# Altium PCB RTD 1k Wheatstone PGA-ADC Card.PcbDoc
Units mm, origin at the board's own origin, x right, y up, seen from the top; angles counter-clockwise.
Board outline 60 x 25 mm, 2 copper layers (Top Layer, Bottom Layer), stack 1.621 mm thick; 19 components, 21 nets, 126 pads, 45 vias.
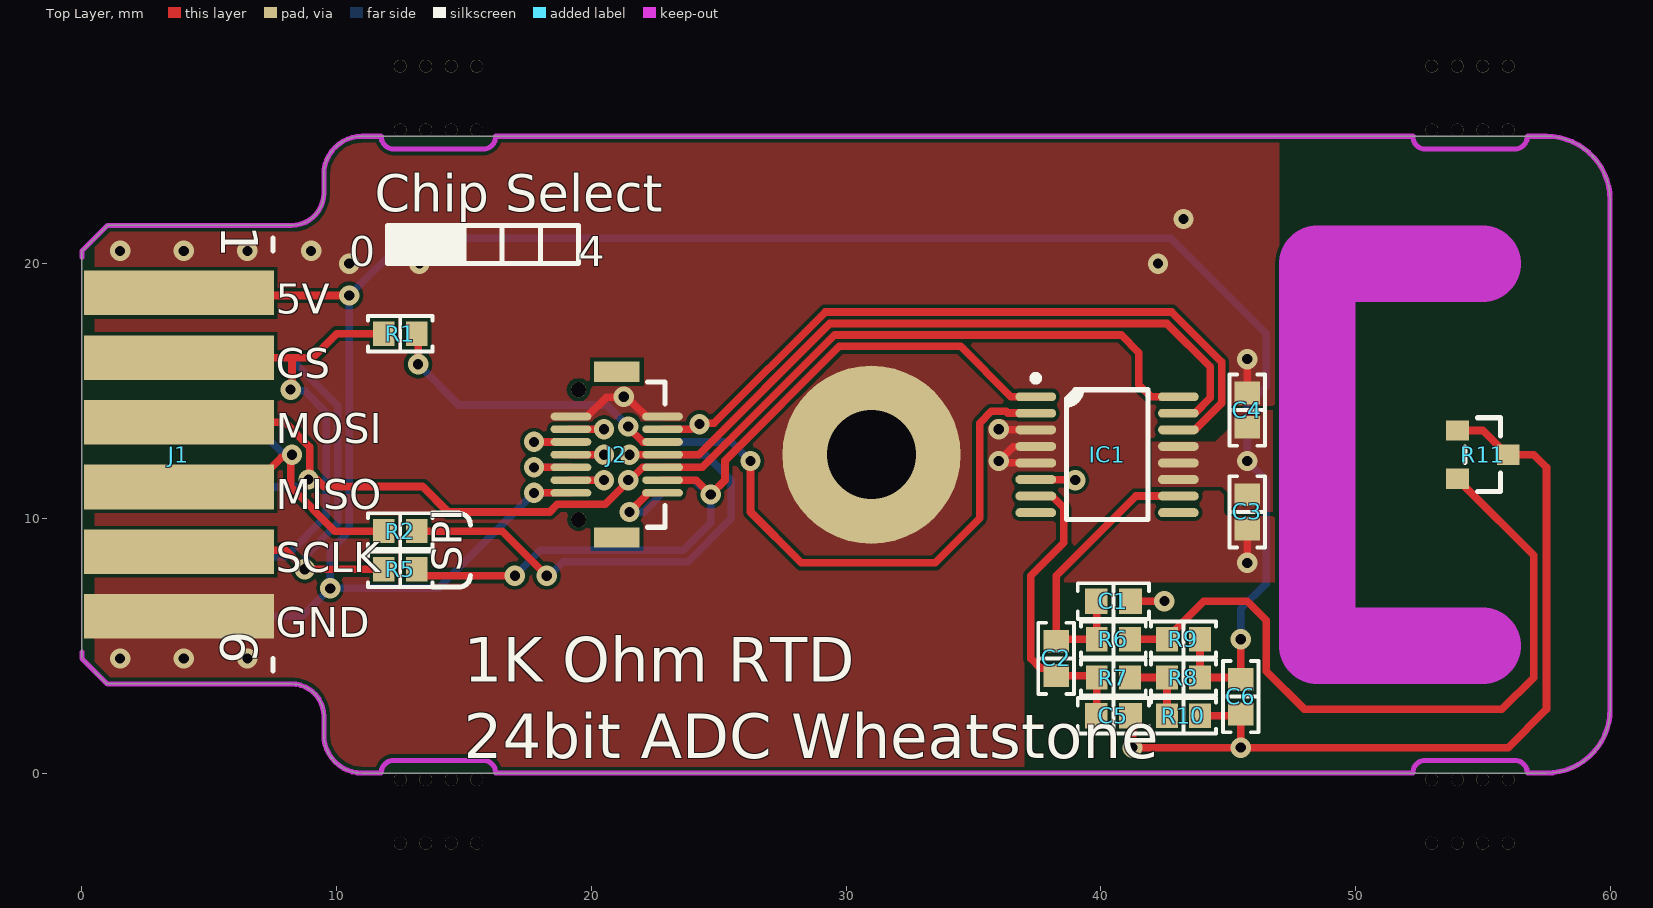
[diagram p0: Top Layer view]
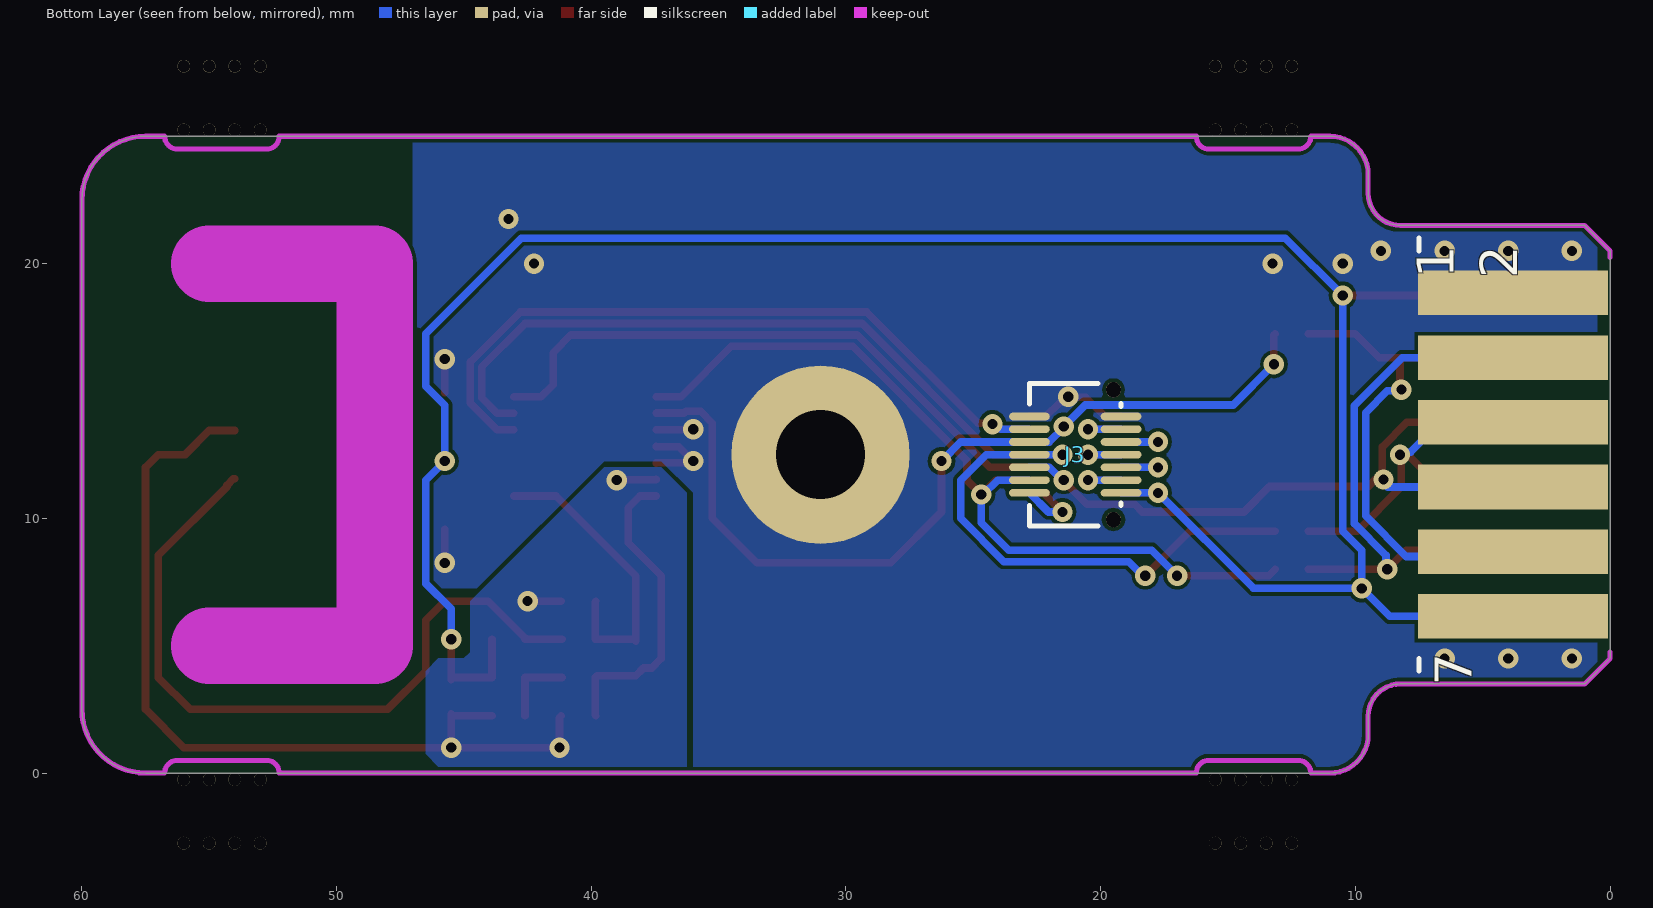
[diagram p1: Bottom Layer view, seen from below]
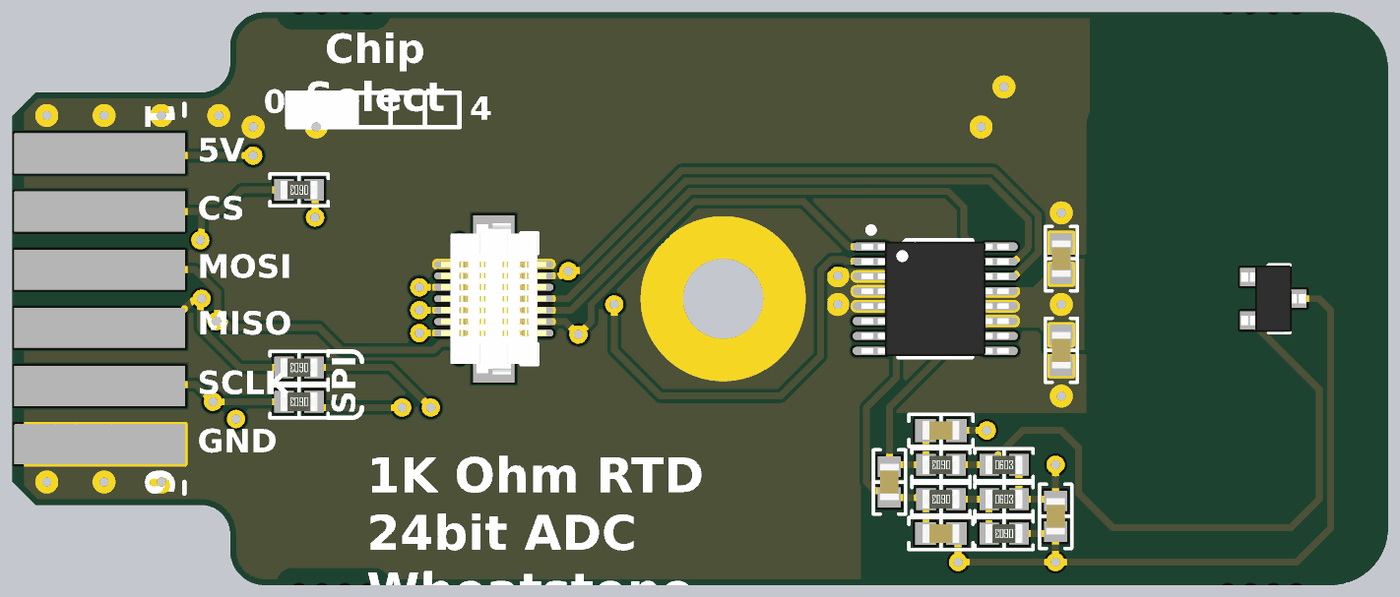
[diagram p2: 3D render of the assembled board from above, using the file's embedded part models]

## Layer stack, top to bottom
Top Solder: solder mask 0.0102, Solder Resist, Dk 3.5
Top Layer: signal copper 0.0356
Dielectric1: core 1.55, FR-4, Dk 4.8
Bottom Layer: signal copper 0.0356
Bottom Solder: solder mask 0.0102, Solder Resist, Dk 3.5

## Board outline
0,4.5 1,3.5 8.23,3.5 cw(c8.23,2.23) 9.5,2.23 9.5,1.5 ccw(c11,1.5) 11,0 57.5,0 ccw(c57.5,2.5) 60,2.5 60,22.5 ccw(c57.5,22.5) 57.5,25 11,25 ccw(c11,23.5) 9.5,23.5 9.5,22.77 cw(c8.23,22.77) 8.23,21.5 1,21.5 0,20.5

## Design rules (kind name [scope] priority, off if disabled: settings)
Clearance PadClearance [IsPad vs IsPad] p1: gap=0.15 ignorepadtopadclearanceinfootprint=FALSE
Clearance [All] p2: gap=0.15 ignorepadtopadclearanceinfootprint=FALSE
Height [All] p1: minheight=0 maxheight=2.9 prefheight=2.9
HoleSize [All] p1: absolutevalues=TRUE maxlimit=6 minlimit=0.4 maxpercent=80.000 minpercent=20.000
HoleToHoleClearance [All] p1: gap=0.2 allowstackedmicrovias=TRUE
MinimumSolderMaskSliver [All] p1: minsoldermaskwidth=0
PolygonConnect ViaConnect [IsVia] p1: connectstyle=Direct reliefconductorwidth=0.254 reliefentries=4 polygonreliefangle="90 Angle" airgapwidth=0.254
PolygonConnect [All] p2: connectstyle=Direct reliefconductorwidth=0.3 reliefentries=4 polygonreliefangle="90 Angle" airgapwidth=0.254
RoutingVias [All] p1: holewidth=0.6 width=1 viastyle="Through Hole" minholewidth=0.4 minwidth=0.8 maxholewidth=5 maxwidth=6
SilkToSilkClearance [All] p1: silktosilkclearance=0
SilkToSolderMaskClearance SilkscreenOverComponentPads [IsPad] p1: minsilkscreentomaskgap=0.05 clearancetoexposedcopper=TRUE
SolderMaskExpansion "Via Tenting" [IsVia] p1: expansion=-2 istentingtop=FALSE
SolderMaskExpansion [All] p2: expansion=0.102 istentingtop=FALSE
Width [All] p1: maxlimit=2 minlimit=0.2 preferedwidth=0.4
24 further rules are at their usual default settings.

## Components (designator, comment, footprint, x,y, rotation, side; value= is the part's Value field where it differs from the comment)
C1 "10000pF" "CAP 0603_1608" 40.5,6.75 r0 top
C2 "0.1µF" "CAP 0603_1608" 38.25,4.5 r270 top
C3 "0.1µF" "CAP 0603_1608" 45.75,10.25 r270 top
C4 "0.1µF" "CAP 0603_1608" 45.75,14.25 r90 top
C5 "10000pF" "CAP 0603_1608" 40.5,2.25 r180 top
C6 "0.1µF" "CAP 0603_1608" 45.5,3 r270 top
IC1 "ADS1120IPWR" "TI TSSOP-16 PW" 40.25,12.5 r0 top
J1 "12 Pin Dual Row" "TE 5650118-3 Card Edge" 0,12.5 r270 top
J2 "DF12(3.0)-14DP-0.5V(86)" "HIROSE DF12 3.0-14DP-0.5V 86" 21,12.5 r90 top
J3 "DF12A(3.0)-14DS-0.5V(81)" "HIROSE DF12A 3.0-14DS-0.5V 81" 21,12.5 r270 bottom
R1 "0 Ohms" "RES 0603_1608" 12.5,17.25 r180 top
R2 "0 Ohms" "RES 0603_1608" 12.5,9.5 r180 top
R5 "0 Ohms" "RES 0603_1608" 12.5,8 r180 top
R6 "1 kOhms" "RES 0603_1608" 40.5,5.25 r180 top
R7 "1 kOhms" "RES 0603_1608" 40.5,3.75 r180 top
R8 "10 kOhms" "RES 0603_1608" 43.25,3.75 r0 top
R9 "10 kOhms" "RES 0603_1608" 43.25,5.25 r0 top
R10 "1 kOhms" "RES 0603_1608" 43.25,2.25 r180 top
R11 "ZNI1000TA" "DIODES SOT-23-3" 55,12.5 r0 top

## Footprints (in the part's own frame and the unit in brackets; to place one, negate y for a bottom-side part, rotate by r counter-clockwise, add the part's x,y. Pads: shape width x height; smd on the part's side, far side on the other; paste and mask are expansions set on the pad)
"CAP 0603_1608" [mm] "Chip Capacitor, 2-Leads, Body 1.60x0.80mm, IPC Medium Density"
  rect 0.9x1 smd: 1(-0.675,0) 2(0.675,0)
  silkscreen extent -1.4,-0.7 1.4,0.7, body extent -0.8,-0.41 0.8,0.41, height 0.82
"DIODES SOT-23-3" [mm] "SOT23, 3-Leads, Body 2.90x2.40mm, Pitch 0.95mm, IPC Medium Density"
  rect 0.9x0.8 smd: 1(-1,0.95) 2(-1,-0.95) 3(1,0)
  silkscreen extent -0.7,-1.45 0.7,1.45, body extent -1.41,-1.45 1.41,1.45, height 1.5
"HIROSE DF12 3.0-14DP-0.5V 86" [mm] "14 Position Connector Header, 0.50mm Pitch,5.7x3.8mm Body"
  oval 0.3x1.6 smd: 1(-1.5,-1.8) 2(-1,-1.8) 3(-0.5,-1.8) 4(0,-1.8) 5(0.5,-1.8) 6(1,-1.8) 7(1.5,-1.8) 8(1.5,1.8) 9(1,1.8) 10(0.5,1.8) 11(0,1.8) 12(-0.5,1.8) 13(-1,1.8) 14(-1.5,1.8)
  round 0.6 hole 0.6 unplated: B(-2.55,1.5) B(2.55,1.5)
  rect 0.8x1.8 smd: M(-3.25,0) M(3.25,0)
  silkscreen extent -2.85,-1.9 2.85,-1.2, body extent -3.3,-2.3 3.3,2.3, height 2.3
"HIROSE DF12A 3.0-14DS-0.5V 81" [mm] "14 Position Connector Receptacle, 0.50mm Pitch,5.60x3.60mm Body"
  oval 0.3x1.6 smd: 1(1.5,-1.8) 2(1,-1.8) 3(0.5,-1.8) 4(0,-1.8) 5(-0.5,-1.8) 6(-1,-1.8) 7(-1.5,-1.8) 8(-1.5,1.8) 9(-1,1.8) 10(-0.5,1.8) 11(0,1.8) 12(0.5,1.8) 13(1,1.8) 14(1.5,1.8)
  round 0.6 hole 0.6 unplated: B(-2.55,1.5) B(2.55,1.5)
  silkscreen extent -2.8,-1.8 2.8,1.8, body extent -2.8,-2.3 2.8,2.3, height 2.2
"RES 0603_1608" [mm] "Chip Resistor, 2-Leads, Body 1.60x0.80mm, IPC Medium Density"
  rect 0.85x0.95 smd: 1(-0.65,0) 2(0.65,0)
  silkscreen extent -1.27,-0.7 1.27,0.7, body extent -0.8,-0.4 0.8,0.4, height 0.45
"TE 5650118-3 Card Edge" [mm] "Card Edge contacts for TE Connector"
  rect 1.75x7.46 smd: 1(-6.35,3.81) 2(-3.81,3.81) 3(-1.27,3.81) 4(1.27,3.81) 5(3.81,3.81) 6(6.35,3.81)
  rect 1.75x7.46 smd far side: 7(6.35,3.81) 8(3.81,3.81) 9(1.27,3.81) 10(-1.27,3.81) 11(-3.81,3.81) 12(-6.35,3.81)
  silkscreen extent -8.5,7.5 8.5,7.5
"TI TSSOP-16 PW" [mm] "TSSOP, 16-Leads, Body 5.00x4.40mm, Pitch 0.65mm, IPC Medium Density"
  oval 1.6x0.35 smd: 1(-2.8,2.275) 2(-2.8,1.625) 3(-2.8,0.975) 4(-2.8,0.325) 5(-2.8,-0.325) 6(-2.8,-0.975) 7(-2.8,-1.625) 8(-2.8,-2.275) 9(2.8,-2.275) 10(2.8,-1.625) 11(2.8,-0.975) 12(2.8,-0.325) 13(2.8,0.325) 14(2.8,0.975) 15(2.8,1.625) 16(2.8,2.275)
  silkscreen extent -2.92,-2.55 1.6,3.12, body extent -3.21,-2.5 3.21,2.5, height 1.2

## Part data
C1 C5: library part AC0603KPX7R9BB103, "CAP CER 10000PF 50V X7R 0603", Device Package="0603 (1608 Metric)", Manufacturer=Yageo, Operating Temperature="-55°C ~ 125°C", Ratings=AEC-Q200, Supplier Part Number 1=311-3284-1-ND, Temperature Coefficient=X7R, Tolerance=±10%, Voltage - Rated=50V, Applications=Automotive, Capacitance=10000pF, ComponentLink1Description=Datasheet, ComponentLink1URL=http://www.yageo.com/NewPortal/_en/search/productDocs.jsp?YageoPartNumber=AC0603KPX7R9BB103, ComponentLink2Description="DigiKey Link", ComponentLink2URL=http://digikey.com/product-detail/en/yageo/AC0603KPX7R9BB103/311-3284-1-ND/6643536, LastUpdated="02/09/2020 01:03:31", Lifecycle Status=Active, Minimum Order=1, Mounting Type="Surface Mount, MLCC", Package / Case="0603 (1608 Metric)", Packaging=TapeAndReel, Part Number=AC0603KPX7R9BB103, Part Status=Active, PartId=5188, Price=0.01, Series=AC, Size / Dimension="0.063\" L x 0.031\" W (1.60mm x 0.80mm)", Supplier 1=DigiKey, Thickness (Max)="0.035\" (0.90mm)"
C2 C3 C4 C6: library part CC0603ZRY5V7BB104, "CAP CER 0.1UF 16V Y5V 0603", Device Package="0603 (1608 Metric)", Manufacturer=Yageo, Operating Temperature="-30°C ~ 85°C", Supplier Part Number 1=311-1369-1-ND, Temperature Coefficient="Y5V (F)", Tolerance="-20%, +80%", Voltage - Rated=16V, Applications="General Purpose", Capacitance=0.1µF, ComponentLink1Description=Datasheet, ComponentLink1URL=http://www.yageo.com/documents/recent/UPY-GPHC_Y5V_6.3V-to-50V_8.pdf, ComponentLink2Description="DigiKey Link", ComponentLink2URL=http://digikey.com/product-detail/en/yageo/CC0603ZRY5V7BB104/311-1369-1-ND/2103153, LastUpdated="21/01/2020 00:01:38", Lifecycle Status=Active, Minimum Order=1, Mounting Type="Surface Mount, MLCC", Package / Case="0603 (1608 Metric)", Packaging=TapeAndReel, Part Number=CC0603ZRY5V7BB104, Part Status=Active, PartId=17881, Price=0.01, Series=CC, Size / Dimension="0.063\" L x 0.031\" W (1.60mm x 0.80mm)", Supplier 1=DigiKey, Thickness (Max)="0.035\" (0.90mm)"
IC1: "IC ADC 16BIT SIGMA-DELTA 16TSSOP", Device Package="16-TSSOP (0.173\", 4.40mm Width)", Manufacturer="Texas Instruments", Operating Temperature="-40°C ~ 125°C", Supplier Device Package=16-TSSOP, Supplier Part Number 1=296-37280-2-ND, Voltage - Supply, Analog="2.3V ~ 5.5V", Architecture=Sigma-Delta, ComponentLink1Description=Datasheet, ComponentLink1URL=http://www.ti.com/general/docs/suppproductinfo.tsp?distId=10&gotoUrl=http%3A%2F%2Fwww.ti.com%2Flit%2Fgpn%2Fads1120, ComponentLink2Description="DigiKey Link", ComponentLink2URL=//digikey.com/product-detail/en/texas-instruments/ADS1120IPWR/296-37280-2-ND/4701590, Configuration=MUX-PGA-ADC, Data Interface=SPI, Features="PGA, Temperature Sensor", Input Type="Differential, Single Ended", LastUpdated="02/12/2019 15:46:46", Lifecycle Status=0, Minimum Order=1, Mounting Type="Surface Mount", Number of A/D Converters=1, Number of Bits=16, Number of Inputs="2, 4", Package / Case="16-TSSOP (0.173\", 4.40mm Width)", Packaging=TapeAndReel, Part Number=ADS1120IPWR, Part Status=Active, PartId=4, Price=3.47, Reference Type="External, Internal, Supply", Sampling Rate (Per Second)=2k, Series=-, Supplier 1=DigiKey, Voltage - Supply, Digital="2.3V ~ 5.5V"
J2: "CONN HDR 14POS SMD GOLD", Manufacturer="Hirose Electric Co Ltd", Supplier Part Number 1=H11701CT-ND, ComponentLink1Description=Datasheet, ComponentLink1URL=https://www.hirose.com/product/download/?distributor=digikey&type=specSheet&lang=en&num=DF12(3.0)-14DP-0.5V(86), ComponentLink2Description="DigiKey Link", ComponentLink2URL=http://digikey.com/product-detail/en/hirose-electric-co-ltd/DF12-3.0-14DP-0.5V-86/H11701CT-ND/2172493, Connector Type="Header, Outer Shroud Contacts", Contact Finish=Gold, Contact Finish Thickness="8.00µin (0.203µm)", Features="Board Guide, Solder Retention", Height Above Board="0.091\" (2.30mm)", LastUpdated="06/08/2020 22:47:47", Lifecycle Status=Active, Mated Stacking Heights=3mm, Minimum Order=1, Mounting Type="Surface Mount", Number of Positions=14, Number of Rows=2, Packaging=TapeAndReel, Part Number=DF12(3.0)-14DP-0.5V(86), Part Status=Active, Pitch="0.020\" (0.50mm)", Price=0.38, Series=DF12, Supplier 1=DigiKey
J3: "CONN RCPT 14POS SMD GOLD", Manufacturer="Hirose Electric Co Ltd", Supplier Part Number 1=H11713CT-ND, ComponentLink1Description=Datasheet, ComponentLink1URL=https://www.hirose.com/product/document?clcode=CL0537-0721-0-86&productname=DF12(3.0)-10DP-0.5V(86)&series=DF12&documenttype=Catalog&lang=en&documentid=D31693_en, ComponentLink2Description="DigiKey Link", ComponentLink2URL=http://digikey.com/product-detail/en/hirose-electric-co-ltd/DF12A-3.0-14DS-0.5V-81/H11713CT-ND/2172505, Connector Type="Receptacle, Center Strip Contacts", Contact Finish=Gold, Contact Finish Thickness="8.00µin (0.203µm)", Features="Board Guide", Height Above Board="0.087\" (2.20mm)", LastUpdated="06/08/2020 22:48:47", Lifecycle Status=Active, Mated Stacking Heights=3mm, Minimum Order=1, Mounting Type="Surface Mount", Number of Positions=14, Number of Rows=2, Packaging=TapeAndReel, Part Number=DF12A(3.0)-14DS-0.5V(81), Part Status=Active, Pitch="0.020\" (0.50mm)", Price=0.36, Series=DF12, Supplier 1=DigiKey
R1 R2 R5: library part ERJ-3GEY0R00V, "RES SMD 0 OHM JUMPER 1/10W 0603", Device Package="0603 (1608 Metric)", Manufacturer="Panasonic Electronic Components", Operating Temperature="-55°C ~ 155°C", Power (Watts)="0.1W, 1/10W", Ratings=AEC-Q200, Supplier Device Package=0603, Supplier Part Number 1=P0.0GCT-ND, Tolerance=Jumper, ComponentLink1Description=Datasheet, ComponentLink1URL=http://industrial.panasonic.com/www-cgi/jvcr13pz.cgi?E+PZ+3+AOA0001+ERJ3GEY0R00V+7+WW, ComponentLink2Description="DigiKey Link", ComponentLink2URL=http://digikey.com/product-detail/en/panasonic-electronic-components/ERJ-3GEY0R00V/P0.0GCT-ND/134711, Composition="Thick Film", Features="Automotive AEC-Q200", Height - Seated (Max)="0.022\" (0.55mm)", LastUpdated="13/08/2020 10:36:40", Lifecycle Status=Active, Minimum Order=1, Number of Terminations=2, Package / Case="0603 (1608 Metric)", Packaging=CutTape, Part Number=ERJ-3GEY0R00V, Part Status=Active, PartId=22603, Price=0.10, Resistance="0 Ohms", Series=ERJ, Size / Dimension="0.063\" L x 0.031\" W (1.60mm x 0.80mm)", Supplier 1=DigiKey
R6 R7 R10: library part ERJ-PB3B1001V, "RES SMD 1K OHM 0.1% 1/5W 0603", Device Package="0603 (1608 Metric)", Manufacturer="Panasonic Electronic Components", Operating Temperature="-55°C ~ 155°C", Power (Watts)="0.2W, 1/5W", Ratings=AEC-Q200, Supplier Device Package=0603, Supplier Part Number 1=P19972CT-ND, Temperature Coefficient=±50ppm/°C, Tolerance=±0.1%, ComponentLink1Description=Datasheet, ComponentLink1URL=https://industrial.panasonic.com/cdbs/www-data/pdf/RDM0000/AOA0000C328.pdf, ComponentLink2Description="DigiKey Link", ComponentLink2URL=http://digikey.com/product-detail/en/panasonic-electronic-components/ERJ-PB3B1001V/P19972CT-ND/6214227, Composition="Thick Film", Features="Automotive AEC-Q200, Pulse Withstanding", Height - Seated (Max)="0.022\" (0.55mm)", LastUpdated="21/01/2020 00:19:14", Lifecycle Status=Active, Minimum Order=1, Number of Terminations=2, Package / Case="0603 (1608 Metric)", Packaging=TapeAndReel, Part Number=ERJ-PB3B1001V, Part Status=Active, PartId=18865, Price=0.03, Resistance="1 kOhms", Series=ERJ, Size / Dimension="0.063\" L x 0.031\" W (1.60mm x 0.80mm)", Supplier 1=DigiKey
R8 R9: library part ERA-3AEB103V, "RES SMD 10K OHM 0.1% 1/10W 0603", Device Package="0603 (1608 Metric)", Manufacturer="Panasonic Electronic Components", Operating Temperature="-55°C ~ 155°C", Power (Watts)="0.1W, 1/10W", Ratings=AEC-Q200, Supplier Device Package=0603, Supplier Part Number 1=P10KDBCT-ND, Temperature Coefficient=±25ppm/°C, Tolerance=±0.1%, ComponentLink1Description=Datasheet, ComponentLink1URL=https://industrial.panasonic.com/cdbs/www-data/pdf/RDM0000/AOA0000C307.pdf, ComponentLink2Description="DigiKey Link", ComponentLink2URL=http://digikey.com/product-detail/en/panasonic-electronic-components/ERA-3AEB103V/P10KDBCT-ND/1466076, Composition="Thin Film", Features="Automotive AEC-Q200", Height - Seated (Max)="0.022\" (0.55mm)", LastUpdated="21/01/2020 00:24:44", Lifecycle Status=Active, Minimum Order=1, Number of Terminations=2, Package / Case="0603 (1608 Metric)", Packaging=TapeAndReel, Part Number=ERA-3AEB103V, Part Status=Active, PartId=5506, Price=0.04, Resistance="10 kOhms", Series=ERA-3A, Size / Dimension="0.063\" L x 0.031\" W (1.60mm x 0.80mm)", Supplier 1=DigiKey
R11: "SENSOR RTD 1KOHM 5% TO236-3", Current=3mA, Device Package="TO-236-3, SC-59, SOT-23-3", Manufacturer="Diodes Incorporated", Operating Temperature="-55°C ~ 150°C", Resistance @ 0°C="1 kOhms", Supplier Part Number 1=ZNI1000CT-ND, Accuracy=±0.4°C, ComponentLink1Description=Datasheet, ComponentLink1URL=https://www.diodes.com/assets/Datasheets/ZNI1000.pdf, ComponentLink2Description="DigiKey Link", ComponentLink2URL=http://digikey.com/product-detail/en/diodes-incorporated/ZNI1000TA/ZNI1000CT-ND/1211584, LastUpdated="25/05/2020 21:35:29", Lifecycle Status=Active, Minimum Order=1, Mounting Type="Surface Mount", Package / Case="TO-236-3, SC-59, SOT-23-3", Packaging=TapeAndReel, Part Number=ZNI1000TA, Part Status=Active, Price=1.16, RTD Material=Nickel, Supplier 1=DigiKey, Termination="SMD (SMT) Tabs"

## Free pads (board coordinates)
  round 7 hole 3.5: M(31,12.5)
  round 0.5 hole 0.5 unplated: N(12.5,-2.75) N(12.5,-0.25) N(12.5,25.25) N(12.5,27.75) N(13.5,-2.75) N(13.5,-0.25) N(13.5,25.25) N(13.5,27.75) N(14.5,-2.75) N(14.5,-0.25) N(14.5,25.25) N(14.5,27.75) N(15.5,-2.75) N(15.5,-0.25) N(15.5,25.25) N(15.5,27.75) N(53,-2.75) N(53,-0.25) N(53,25.25) N(53,27.75) N(54,-2.75) N(54,-0.25) N(54,25.25) N(54,27.75) N(55,-2.75) N(55,-0.25) N(55,25.25) N(55,27.75) N(56,-2.75) N(56,-0.25) N(56,25.25) N(56,27.75)

## Via types
v1: diameter 0.8, hole 0.4, Top Layer to Bottom Layer, 45 vias

## Nets (pads, with @x,y where several pads share a name; then routed paths per layer and width w, separated by ;. In a path a pad name is that pad's centre, name@x,y a point inside that pad or via, vN(x,y) a via of type N, cw(c..) or ccw(c..) an arc to the next point about the centre after c; other vN are vias at no path point)
3V3: J2.1 J3.1 | length 3.3
  Top Layer w0.3: v1(21.5,10.25) 22.15,10.9 22.15,11 J2.1
  Bottom Layer w0.3: v1(21.5,10.25) 22.05,10.25 J3.1
5V: C3.1 C4.1 C6.1 IC1.11 IC1.12 IC1.13 J1.1 J1.7 J2.14 J3.14 R8.2 R9.2 | length 93.4
  Top Layer w0.3: J1.1 3.91,18.75 v1(10.5,18.75) ; v1(17.75,11) J2.14 ; R9.2 R8.2 45.425,3.75 C6.1 v1(45.5,5.25)
  Bottom Layer w0.3: J1.7 8.65,6.15 v1(9.75,7.25) ; v1(17.75,11) 14,7.25 v1(9.75,7.25) ; v1@18,11 J3.14 ; v1(45.5,5.25) 45.5,6.443 46.5,7.443 46.5,11.5 v1(45.75,12.25) 45.75,14.443 46.5,15.193 46.5,17.25 42.75,21 12.75,21 v1(10.5,18.75) 10.5,9.5 9.75,8.75 v1(9.75,7.25)
CS: J1.2 J1.8 R1.2 | length 22.1
  Top Layer w0.3: J1.2 8.25,16.31 ; v1(8.194,15.056) 8.25,15.111 8.25,16.31 ; R1.2 10,17.25 9.06,16.31 8.25,16.31
  Bottom Layer w0.3: J1.8 4,8.5 8,8.5 9.6,10.1 9.6,14.15 8.745,15.005 8.245,15.005 v1(8.194,15.056)
CS0: IC1.2 J2.5 J3.5 R1.1 | length 36.2
  Top Layer w0.3: R1.1 13.2,17.2 v1(13.2,16.05) ; v1(21.45,13.607) 21.45,13.564 22.014,13 J2.5 ; v1(26.25,12.25) 26.25,10.25 28.25,8.25 33.5,8.25 35.25,10 35.25,13.74 35.71,14.2 36.29,14.2 36.355,14.135 37.44,14.135 IC1.2
  Bottom Layer w0.3: v1(13.2,16.05) 14.8,14.45 20.607,14.45 v1(21.45,13.607) 21.45,13.564 22.014,13 25.5,13 v1(26.25,12.25)
CS1: IC1.14 J2.6 J3.6 | length 29.5
  Top Layer w0.3: J2.6 23.915,13.5 24.115,13.7 v1(24.25,13.7) 24.286,13.736 24.816,13.736 29.181,18.1 42.786,18.1 44.75,16.136 44.75,14.528 43.722,13.5 43.714,13.5 43.689,13.475 IC1.14
  Bottom Layer w0.3: J3.6 v1@23.915,13.5
CS2: J2.13 J3.13 | length 2.6
  Top Layer w0.3: J2.13 v1(20.5,11.5)
  Bottom Layer w0.3: J3.13 v1(20.5,11.5)
CS3: J2.12 J3.12 | length 2.9
  Top Layer w0.3: v1(17.75,12) J2.12
  Bottom Layer w0.3: v1(17.75,12) J3.12
CS4: J2.11 J3.11 | length 2.6
  Top Layer w0.3: J2.11 v1(20.5,12.5)
  Bottom Layer w0.3: J3.11 v1(20.5,12.5)
DCLK: J1.5 J1.11 R5.2 | length 22.4
  Top Layer w0.3: J1.5 3.87,8.75 8,8.75 v1(8.75,8) 10.75,8 R5.2
  Bottom Layer w0.3: J1.11 8.167,16.31 10.05,14.427 10.05,9.8 8.801,8.551 8.801,8.051 v1(8.75,8)
DD: J1.4 J1.10 R2.2 | length 15.1
  Top Layer w0.3: J1.4 6.665,11.23 7.839,12.404 ; v1(8.25,12.5) 8.2,12.45 8.2,11.235 9.935,9.5 R2.2
  Bottom Layer w0.3: J1.10 6.665,13.77 7.839,12.596 8.154,12.596 v1(8.25,12.5)
GND: C3.2 C4.2 IC1.3 IC1.4 IC1.5 J1.6 J1.12 J2.7 J2.8 J3.7 J3.8 pad.M | length 11.7
  Top Layer w0.3: J1.6 J1.6@3.91,6.25 ; J2.8 19.85,14 20.6,14.75 21.25,14.75 21.4,14.75 21.65,14.5 22.15,14 J2.7 ; v1@21.273,14.75 v1(21.273,14.773) ; v1(36,13.5) 36.015,13.485 37.44,13.485 IC1.3 ; IC1.5 37.44,12.185 36.065,12.185 v1(36,12.25) 36.565,12.815 37.44,12.815 IC1.4 ; v1(45.75,8.25) C3.2 ; C4.2 v1(45.75,16.25)
  other v1: 1.5,4.5 4,4.5 6.5,4.5 10.5,20 13.25,20 42.25,20 1.5,20.5 4,20.5 6.5,20.5 9,20.5 9,20.5 43.25,21.75
I2C_SCL: J2.10 J3.10 | length 2.9
  Top Layer w0.3: v1(17.75,13) J2.10
  Bottom Layer w0.3: v1(17.75,13) J3.10
I2C_SDA: J2.9 J3.9 | length 2.6
  Top Layer w0.3: J2.9 v1(20.5,13.5)
  Bottom Layer w0.3: J3.9 v1(20.5,13.5)
MISO: IC1.15 J2.4 J3.4 R2.1 | length 48.3
  Top Layer w0.3: R2.1 16.5,9.5 v1(18.25,7.75) ; v1(21.5,12.5) 24.217,12.5 29.367,17.65 42.6,17.65 44.3,15.95 44.3,14.728 43.722,14.15 43.714,14.15 43.689,14.125 IC1.15
  Bottom Layer w0.3: v1(18.25,7.75) 18.352,7.75 18.902,8.3 23.8,8.3 25.5,10 25.5,11.5 24.5,12.5 J3.4 v1(21.5,12.5)
MOSI: IC1.16 J1.3 J1.9 J2.3 J3.3 | length 52.9
  Top Layer w0.3: J1.3 7.98,13.77 8.95,12.8 8.95,11.8 9.1,11.65 9.1,11.525 v1(8.9,11.525) ; v1@9.225,11.525 9.5,11.25 13.375,11.25 14.375,10.25 18.37,10.25 18.67,10.55 20.54,10.55 21.45,11.46 v1(21.45,11.5) 21.514,11.5 22.014,12 J2.3 24.354,12 29.554,17.2 40.8,17.2 41.5,16.5 41.5,15.25 41.975,14.775 IC1.16
  Bottom Layer w0.3: J1.9 8.724,11.23 8.9,11.406 v1(8.9,11.525) ; v1(21.45,11.5) 21.514,11.5 22.014,12 J3.3
NetC1_1: C1.1 C2.1 IC1.10 R6.2 | length 11.8
  Top Layer w0.3: C1.1 39.85,6.725 R6.2 38.325,5.25 C2.1 38.25,7.75 41.375,10.875 IC1.10
NetC2_2: C2.2 C5.2 IC1.7 R7.2 | length 12.2
  Top Layer w0.3: IC1.7 38.089,10.875 38.114,10.85 38.122,10.85 38.55,10.422 38.55,9.05 37.25,7.75 37.25,4.5 37.625,4.125 37.95,4.125 C2.2 39.775,3.825 R7.2 39.85,2.275 C5.2
NetR6_1: R6.1 R9.1 R11.2 | length 29
  Top Layer w0.3: R6.1 R9.1 42.6,5.3 44.05,6.75 45.75,6.75 46.5,6 46.5,4 48,2.5 55.75,2.5 57,3.75 57,8.55 54.3,11.25 54.3,11.3 54.05,11.55 R11.2
NetR7_1: R7.1 R8.1 R10.2 | length 2.9
  Top Layer w0.3: R7.1 R8.1 R10.2
REFN: C1.2 C5.1 C6.2 IC1.6 R10.1 R11.1 R11.3 | length 37.6
  Top Layer w0.3: IC1.6 37.46,11.515 38.985,11.515 v1(39,11.5) ; C5.1 41.25,2.175 v1(41.25,1) v1(45.5,1) ; C1.2 v1(42.5,6.75) ; R10.1 45.425,2.25 C6.2 v1(45.5,1) ; R11.1 55,13.45 55.95,12.5 R11.3 57,12.5 57.5,12 57.5,2.5 56,1 v1(45.5,1)
SCLK: IC1.1 J2.2 J3.2 R5.1 | length 34.3
  Top Layer w0.3: R5.1 13.4,7.75 v1(17,7.75) ; J2.2 24.115,11.5 24.677,10.938 v1(24.688,10.938) 25.25,11.5 25.25,12.26 29.74,16.75 34.5,16.75 36.475,14.775 IC1.1
  Bottom Layer w0.3: v1(17,7.75) 18,8.75 23.614,8.75 24.688,9.824 v1(24.688,10.938) 24.61,10.938 24.048,11.5 J3.2
pads on no net: IC1.8 IC1.9 J2.B J2.M J3.B

## Polygon pours and split planes (outlines as drawn)
GND on Top Layer "GND_L01_P004" (solid, remove dead copper, pour order 4): 1,21.5 8.25,21.5 ccw(c8.25,22.75) 9.5,22.75 9.5,23.5 cw(c11,23.5) 11,25 47,25 47,7.5 37,7.5 37,0 11,0 cw(c11,1.5) 9.5,1.5 9.5,2.25 ccw(c8.25,2.25) 8.25,3.5 1,3.5 0.5,4 0.5,21
GND on Top Layer "GND_L01_P003" (solid, remove dead copper, pour order 3): 1.25,3.75 0.5,4.5 0.5,7.25 8,7.25 8,3.75
5V on Top Layer "5V" (solid, remove dead copper, pour order 0): 42,13 44.5,13 45,13.5 45,14.25 46.75,14.25 46.75,10.25 45,10.25 45,11 44.75,11.25 42,11.25
REFN on Bottom Layer "REFN_L02_P002" (solid, remove dead copper, pour order 2): 37.25,12 39.5,12 44.75,6.75 44.75,4.75 45,4.5 46,4.5 46.5,4 46.5,0.75 46,0.25 36.25,0.25 36.25,11
GND on Bottom Layer "GND_L02_P001" (solid, remove dead copper, pour order 1): 1,21.5 8.25,21.5 ccw(c8.25,22.75) 9.5,22.75 9.5,23.5 cw(c11,23.5) 11,25 47,25 47,7.25 44.5,7.25 39.5,12.25 37.25,12.25 36,11 36,0 11,0 cw(c11,1.5) 9.5,1.5 9.5,2.25 ccw(c8.25,2.25) 8.25,3.5 1,3.5 0.5,4 0.5,21

## Keep-outs
Keep-Out Layer:
  lines w0.2: 0,4.75 0,4.5 1,3.5 8.23,3.5 cw(c8.23,2.23) 9.5,2.23 9.5,1.5 ccw(c11,1.5) 11,0 11.75,0 cw(c12.25,0) 12.25,0.5 15.75,0.5 cw(c15.75,0) 16.25,0 52.25,0 cw(c52.75,0) 52.75,0.5 56.25,0.5 cw(c56.25,0) 56.75,0 57.5,0 ccw(c57.5,2.5) 60,2.5 60,22.5 ccw(c57.5,22.5) 57.5,25 56.75,25 cw(c56.25,25) 56.25,24.5 52.75,24.5 cw(c52.75,25) 52.25,25 16.25,25 cw(c15.75,25) 15.75,24.5 12.25,24.5 cw(c12.25,25) 11.75,25 11,25 ccw(c11,23.5) 9.5,23.5 9.5,22.77 cw(c8.23,22.77) 8.23,21.5 1,21.5 0,20.5 0,20.25
  lines w3: 55,5 48.5,5 48.5,20 55,20

## Silkscreen, mask and mechanical layers (free items; w line width, h text height)
Top Overlay:
  rectangle: 12,20 15,21.5
  lines w0.2: 13.77,7.3 14.8,7.3 ccw(c14.8,7.75) 15.25,7.75 ; 13.77,10.2 14.8,10.2 cw(c14.8,9.75) 15.25,9.75 ; 13.5,20 15,20 ; 13.5,20 12,20 12,21.5 13.5,21.5 ; 13.5,20 13.5,21.5 ; 13.5,21.5 15,21.5 ; 15,20 16.5,20 ; 15,20 15,21.5 ; 15,21.5 16.5,21.5 ; 16.5,20 18,20 ; 16.5,20 16.5,21.5 ; 16.5,21.5 18,21.5 ; 18,20 19.5,20 19.5,21.5 18,21.5 ; 18,20 18,21.5
  text "Chip Select" at 11.5,21.546 h2.5
  text "0" at 10.5,19.5 h2
  text "4" at 19.5,19.5 h2
  text "5V" at 7.62,17.647 h2
  text "CS" at 7.62,15.104 h2
  text "MOSI" at 7.62,12.564 h2
  text "MISO" at 7.62,9.959 h2
  text "SPI" at 15.297,7.907 h2 r90
  text "SCLK" at 7.62,7.484 h2
  text "GND" at 7.62,4.945 h2
  text "1K Ohm RTD / 24bit ADC Wheatstone" at 15,0 h3
Bottom Overlay:
  text "Analog Temperature Sensor Card" at 38,0 h5
Outlines:
  the board outline again, w0.2
Route Tool Path:
  lines w3: 11,-1.5 cw(c11,1.5) 8,1.5 8,2 1,2 ; 11,26.5 ccw(c11,23.5) 8,23.5 8,23 1,23 ; 17,-1.5 51.5,-1.5 ; 17,26.5 51.5,26.5 ; 55,5 48.5,5 48.5,20 55,20 ; 57.5,-1.5 ccw(c57.5,2.5) 61.5,2.5 61.5,22.5 ccw(c57.5,22.5) 57.5,26.5 ; -1.5,4.5 ccw(c0,4.5) -1.061,3.439 ; -1.5,4.5 ccw(c0,4.5) -1.061,3.439 ; -1.5,4.5 -1.5,20.5 ; -1.5,20.5 cw(c0,20.5) -1.061,21.561 ; -1.5,20.5 cw(c0,20.5) -1.061,21.561 ; -1.061,3.439 -0.061,2.439 ; -1.061,21.561 -0.061,22.561 ; -0.061,2.439 ccw(c1,3.5) 1,2 ; -0.061,2.439 ccw(c1,3.5) 1,2 ; -0.061,22.561 cw(c1,21.5) 1,23 ; -0.061,22.561 cw(c1,21.5) 1,23

## Text inside footprints (layer, text, board x,y; h text height)
J1: Top Overlay "6" at 4.936,5.576 h2.5 r270; Top Overlay "1" at 4.991,21.498 h2.5 r270; Bottom Overlay "1 / 2" at 3.155,19.424 h2.5 r270; Bottom Overlay "7" at 4.936,3.424 h2.5 r270